# Altium PCB MOTHER FINAL.PcbDoc
Units mm, origin at the board's own origin, x right, y up, seen from the top; angles counter-clockwise.
Board outline 77.72 x 82.8 mm, 2 copper layers (Top Layer, Bottom Layer); 20 components, 25 nets, 91 pads, 8 vias.
Unrouted connection lines stored in the file: 1.
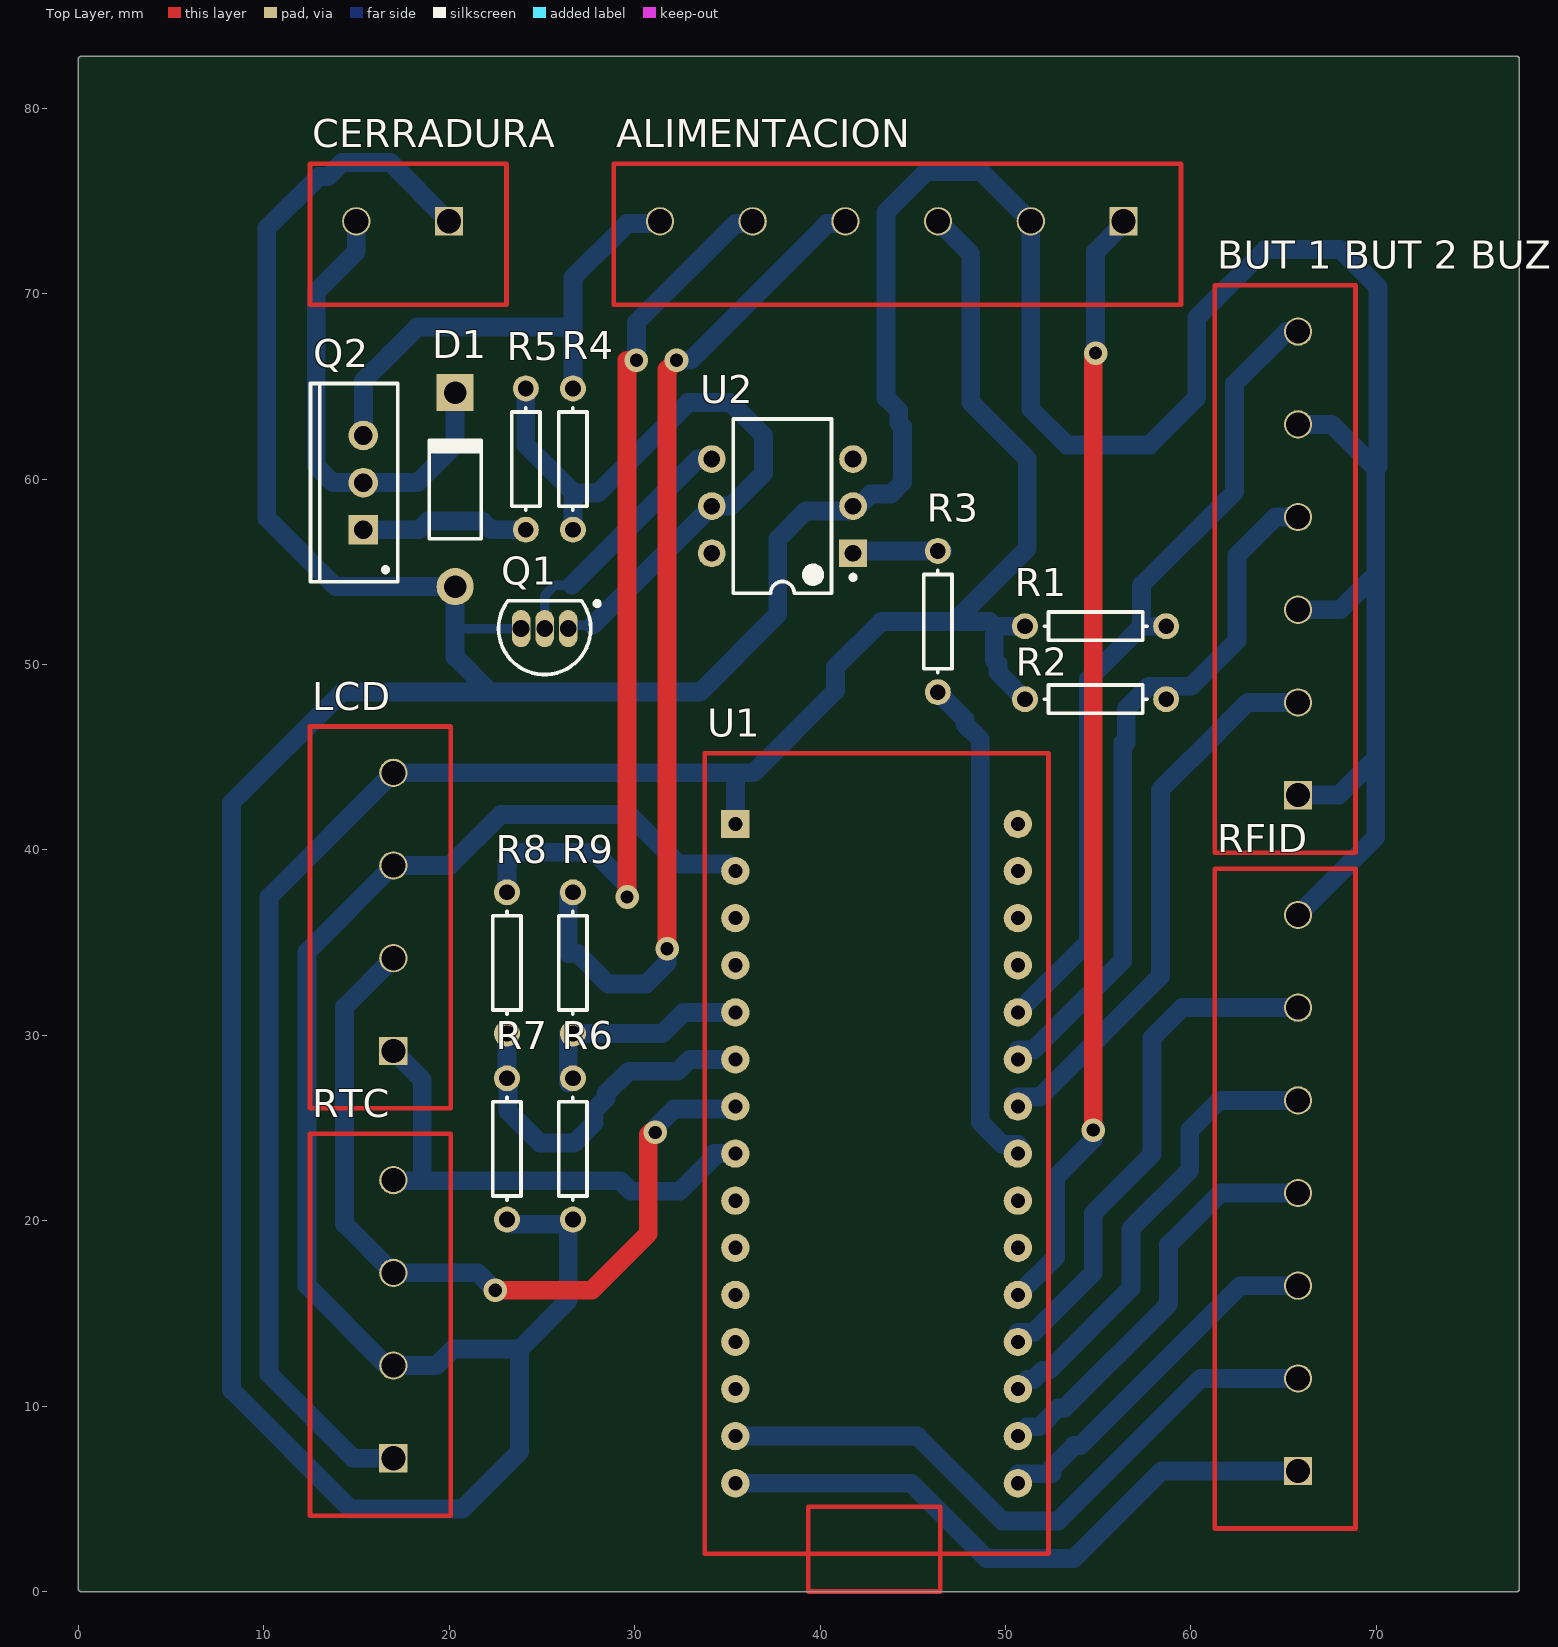
[diagram p0: Top Layer view]
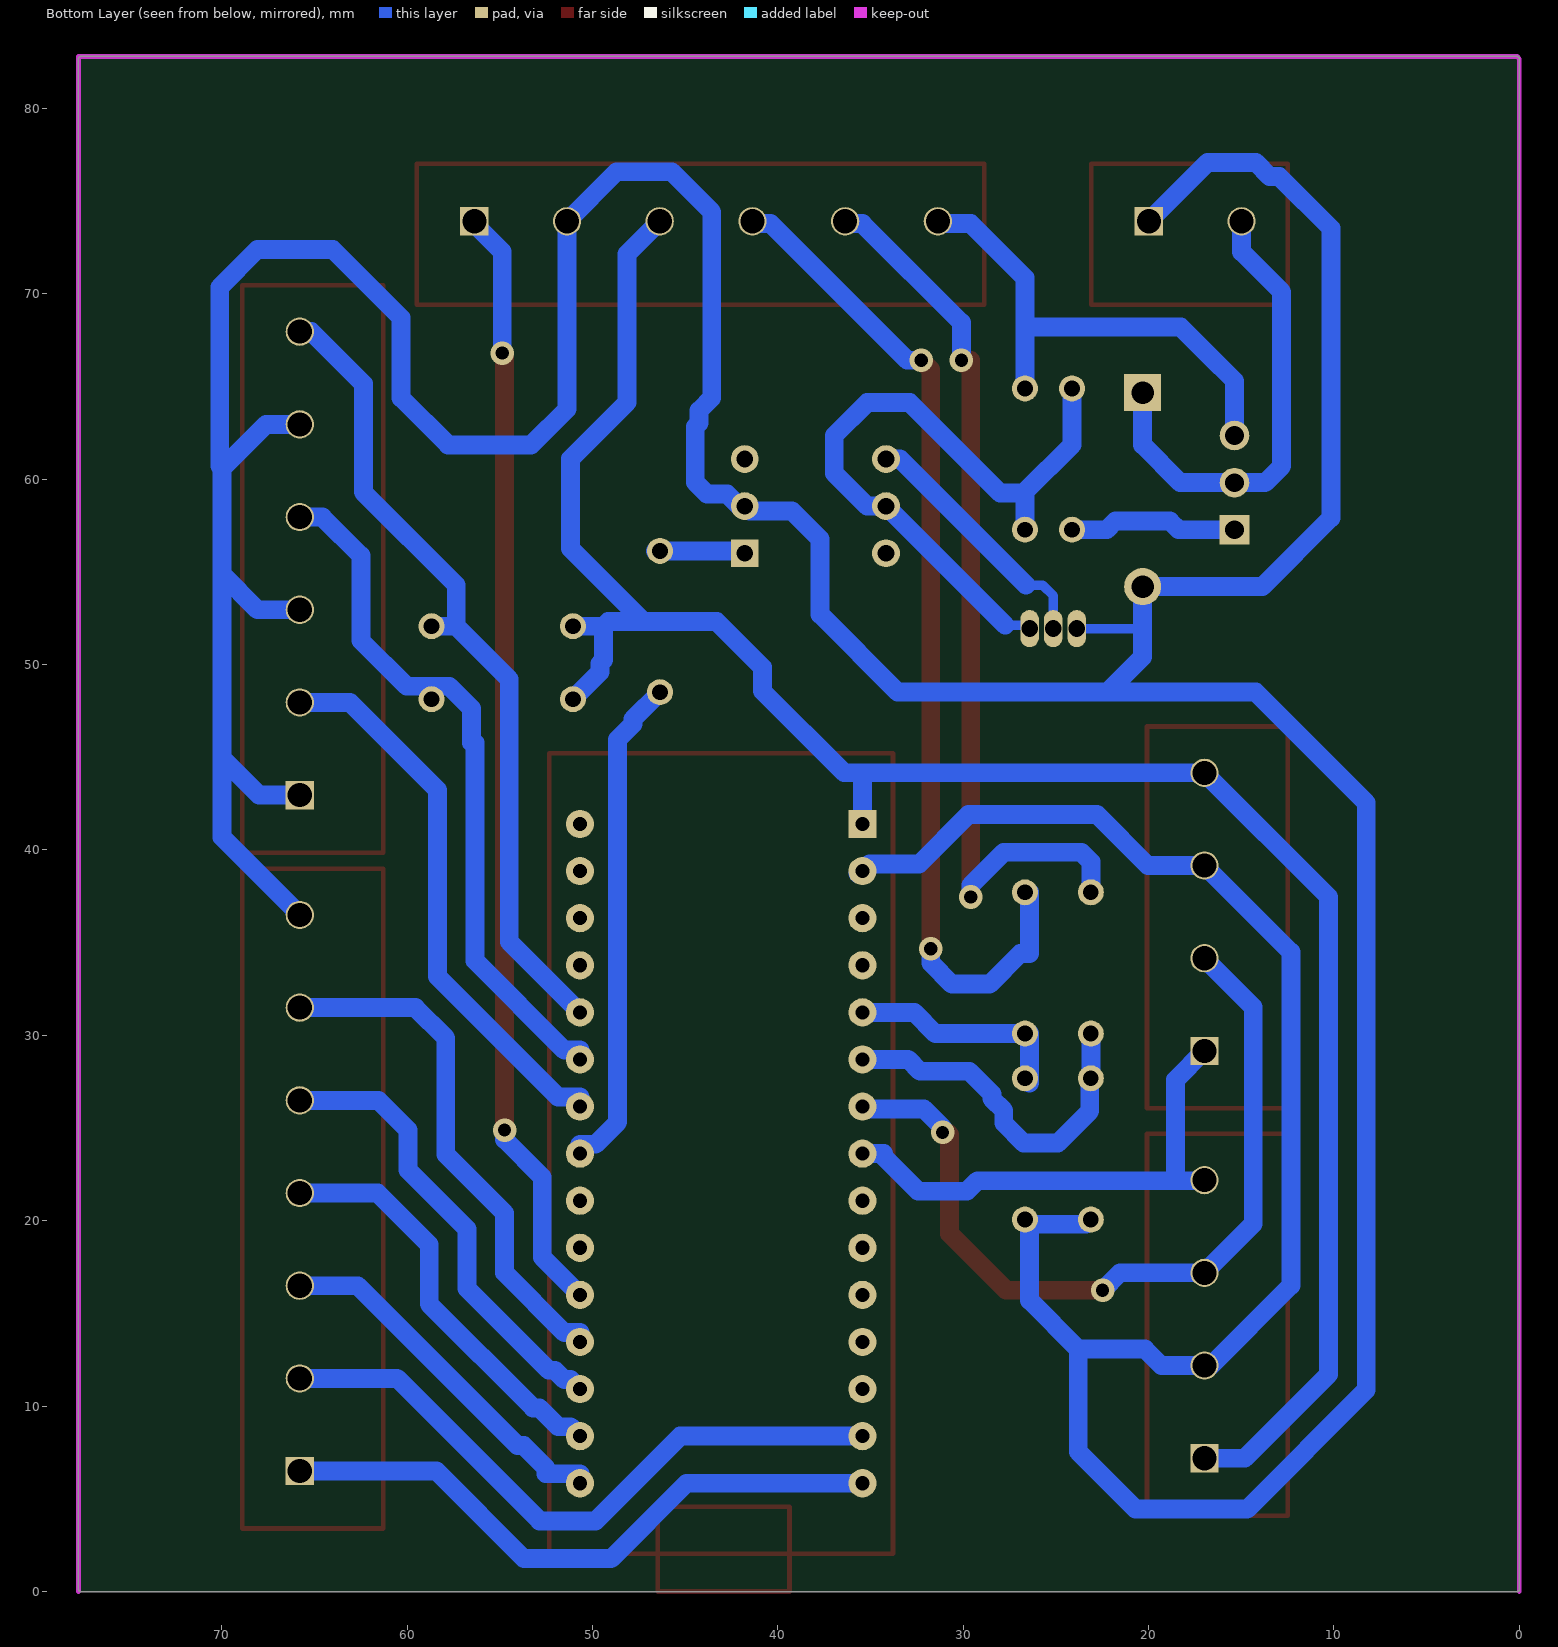
[diagram p1: Bottom Layer view, seen from below]

## Layer stack, top to bottom
Top Solder: solder mask 0.0102, Solder Resist, Dk 3.5
Top Layer: signal copper 0.0356
Dielectric 1: dielectric 0.32, FR-4, Dk 4.8
Bottom Layer: signal copper 0.0356
Bottom Solder: solder mask 0.0102, Solder Resist, Dk 3.5

## Board outline
0,0.127 ccw(c0.127,0.127) 0.127,0 77.597,0 ccw(c77.597,0.127) 77.724,0.127 77.724,82.677 ccw(c77.597,82.677) 77.597,82.804 0.127,82.804 ccw(c0.127,82.677) 0,82.677

## Design rules (kind name [scope] priority, off if disabled: settings)
Clearance [all -  InComponentClass('CLASE VERGA') vs all -  InComponentClass('CLASE VERGA')] p1: gap=2.032 ignorepadtopadclearanceinfootprint=FALSE except(1.016: Arc-Arc Arc-Track Track-Track)
PolygonConnect [All] p1: connectstyle=Relief reliefconductorwidth=0.254 reliefentries=4 polygonreliefangle="90 Angle" airgapwidth=0.254
RoutingVias [All] p1: holewidth=0.711 width=1.27 viastyle="Through Hole" minholewidth=0.711 minwidth=1.27 maxholewidth=0.711 maxwidth=1.27
SolderMaskExpansion [All] p1: expansion=0.102
Width [All] p1: maxlimit=1.016 minlimit=0.508 preferedwidth=1.016
30 further rules are at their usual default settings.

## Classes and differential pairs
component class "Components Class 1": R6 R7
component class "CLASE VERGA": ALIMENTACION "BUT 1 BUT 2 BUZZ" CERRADURA LCD Q1 Q2 R6 R7 R8 R9 RFID RTC U1 U2

## Components (designator, comment, footprint, x,y, rotation, side; value= is the part's Value field where it differs from the comment)
ALIMENTACION "Header 6" "BORNERA 6 PIN" 59.469,69.414 r180 top
"BUT 1 BUT 2 BUZZ" "Header 6" "BORNERA 6 PIN" 61.286,39.859 r90 top
CERRADURA "Header 2" "Bornera 2 pin" 23.086,69.414 r180 top
D1 "Diode 1N4007" DO-41 20.32,59.436 r90 top
LCD "Header 4" "BORNERA 4 PIN" 12.486,26.063 r90 top
Q1 "BC548" TO-92A 25.146,51.943 r90 top
Q2 "TIP32" TO-220AB 15.367,59.817 r90 top
R1 "Res1" AXIAL-0.3 54.864,52.07 r180 top value=1K
R2 "Res1" AXIAL-0.3 54.864,48.133 r180 top value=1K
R3 "Res1" AXIAL-0.3 46.355,52.324 r90 top value=1K
R4 "Res1" AXIAL-0.3 26.67,61.087 r90 top value=1K
R5 "Res1" AXIAL-0.3 24.13,61.087 r270 top value=1K
R6 "Res1" AXIAL-0.3 26.67,23.876 r90 top value=1K
R7 "Res1" AXIAL-0.3 23.114,23.876 r90 top value=1K
R8 "Res1" AXIAL-0.3 23.114,33.909 r90 top value=1K
R9 "Res1" AXIAL-0.3 26.67,33.909 r90 top value=1K
RFID "Header 7" "BORNERA 7 PIN" 61.286,3.396 r90 top
RTC "Header 4" "BORNERA 4 PIN" 12.486,4.092 r90 top
U1 "Arduino Nano" "Arduino nano" 35.433,41.402 r0 top
U2 "Optoisolator1" DIP-6 37.973,58.547 r180 top

## Footprints (in the part's own frame and the unit in brackets; to place one, negate y for a bottom-side part, rotate by r counter-clockwise, add the part's x,y. Pads: shape width x height; smd on the part's side, far side on the other; paste and mask are expansions set on the pad)
"Arduino nano" [mil]
  rect 60x60 hole 30: 1(0,0)
  round 60 hole 30: 2(0,-100) 3(0,-200) 4(0,-300) 5(0,-400) 6(0,-500) 7(0,-600) 8(0,-700) 9(0,-800) 10(0,-900) 11(0,-1000) 12(0,-1100) 13(0,-1200) 14(0,-1300) 15(0,-1400) 16(600,-1400) 17(600,-1300) 18(600,-1200) 19(600,-1100) 20(600,-1000) 21(600,-900) 22(600,-800) 23(600,-700) 24(600,-600) 25(600,-500) 26(600,-400) 27(600,-300) 28(600,-200) 29(600,-100) 30(600,0)
  Top Layer lines w10: -65,-1550 665,-1550 665,150 -65,150 -65,-1550 ; 155,-1630 155,-1550 155,-1450 435,-1450 435,-1550 435,-1630 155,-1630
AXIAL-0.3 [mm] "Axial Device, Thru-Hole; 2 Leads; 0.3 in Pin Spacing"
  round 1.4 hole 0.85: 1(-3.81,0) 2(3.81,0)
  silkscreen extent -2.77,-0.76 2.77,0.76
"Bornera 2 pin" [mm]
  rect 1.524x1.524 hole 1.3: 1(3.1,-4.5)
  round 1.524 hole 1.3: 2(8.1,-4.5)
  Top Layer lines w0.254: 10.6,0 10.6,-7.6 0,-7.6 0,0 10.6,0
"BORNERA 4 PIN" [mm]
  rect 1.524x1.524 hole 1.3: 1(3.1,-4.5)
  round 1.524 hole 1.3: 2(8.1,-4.5) 3(13.1,-4.5) 4(18.1,-4.5)
  Top Layer lines w0.254: 0,0 0,-7.6 20.6,-7.6 20.6,0 0,0
"BORNERA 6 PIN" [mm]
  rect 1.524x1.524 hole 1.3: 1(3.1,-4.5)
  round 1.524 hole 1.3: 2(8.1,-4.5) 3(13.1,-4.5) 4(18.1,-4.5) 5(23.1,-4.5) 6(28.1,-4.5)
  Top Layer lines w0.254: 30.6,0 30.6,-7.6 0,-7.6 0,0 30.6,0
"BORNERA 7 PIN" [mm]
  rect 1.524x1.524 hole 1.3: 1(3.1,-4.5)
  round 1.524 hole 1.3: 2(8.1,-4.5) 3(13.1,-4.5) 4(18.1,-4.5) 5(23.1,-4.5) 6(28.1,-4.5) 7(33.1,-4.5)
  Top Layer lines w0.254: 0,0 35.6,0 35.6,-7.6 0,-7.6 0,0
DIP-6 [mm] "DIP; 6 Leads; Row Spacing 7.62 mm; Pitch 2.54 mm"
  rect 1.5x1.5 hole 0.9: 1(-3.81,2.54)
  round 1.5 hole 0.9: 2(-3.81,0) 3(-3.81,-2.54) 4(3.81,-2.54) 5(3.81,0) 6(3.81,2.54)
  silkscreen extent -3.94,-4.7 2.65,4.7, body extent -3.55,-4.7 3.55,4.7, height 5.46
DO-41 [mm] "Diode, Axial; Body 5.2 x 2.7 mm (LxDia. max), Lead Dia. 0.86 mm (max)"
  round 2 hole 1.2: 1(-5.23,0)
  rect 2x2 hole 1.2: 2(5.23,0)
  silkscreen extent -2.65,-1.4 2.75,1.4
TO-92A [mm] "TO, Flat Index; 3 In-Line, Axial Leads; Body Dia. 4.5mm; Leads 0.51 x 0.48 mm (max)"
  oval 2x1 hole 0.9: 1(0,-1.27) 2(0,0) 3(0,1.27)
  silkscreen extent -2.48,-2.96 1.5,2.48, body extent -2.48,-2.5 1.5,2.5, height 6.86
TO-220AB [mm] "TO, Thru-Hole, Vertical, Heatsink Mounted; 3 In-Line Leads; Pitch 2.54 mm"
  rect 1.6x1.6 hole 1: 1(-2.54,0)
  round 1.6 hole 1: 2(0,0) 3(2.54,0)
  silkscreen extent -5.35,-1.85 5.35,2.85, body extent -5.4,-1.9 5.4,2.9, height 19.3

## Part data
ALIMENTACION "BUT 1 BUT 2 BUZZ": "Header, 6-Pin", LatestRevisionDate=17-Jul-2002, LatestRevisionNote="Re-released for DXP Platform.", Publisher="Altium Limited"
CERRADURA: "Header, 2-Pin", LatestRevisionDate=17-Jul-2002, LatestRevisionNote="Re-released for DXP Platform.", Publisher="Altium Limited"
D1: "1 Amp General Purpose Rectifier", Code_JEDEC=DO-204-AL, ComponentLink1Description="Manufacturer Link", ComponentLink1URL=http://www.fairchildsemi.com/, ComponentLink2Description=Datasheet, ComponentLink2URL=http://www.fairchildsemi.com/ds/1N%2F1N4001.pdf, DatasheetVersion=1998, LatestRevisionDate=17-Jul-2002, LatestRevisionNote="Re-released for DXP Platform.", PackageDescription="Diode, Axial; Body 5.2 x 2.7 mm (LxDia. max), Lead Dia. 0.86 mm (max)", PackageReference=DO-41, PackageVersion=Aug-1999, Published=8-Jun-2000, Publisher="Altium Limited"
LCD RTC: "Header, 4-Pin", LatestRevisionDate=17-Jul-2002, LatestRevisionNote="Re-released for DXP Platform.", Publisher="Altium Limited"
Q1: library part 2N3904, "NPN General Purpose Amplifier", ComponentLink1Description="Manufacturer Link", ComponentLink1URL=http://www.fairchildsemi.com/, ComponentLink2Description=Datasheet, ComponentLink2URL=http://www.fairchildsemi.com/ds/2N%2F2N3904.pdf, DatasheetVersion=1997, LatestRevisionDate=15-Jan-2003, LatestRevisionNote="PCB Footprint 'BCY-W3/D4.7' replaced", PackageDescription="TO, Flat Index; 3 In-Line, Axial Leads; Body Dia. 4.5mm; Leads 0.51 x 0.48 mm (max)", PackageReference=TO-92A, PackageVersion=Sep-1998, Published=8-Jun-2000, Publisher="Altium Limited"
Q2: library part 2N3906, "PNP General Purpose Amplifier", ComponentLink1Description="Manufacturer Link", ComponentLink1URL=http://www.fairchildsemi.com/, ComponentLink2Description=Datasheet, ComponentLink2URL=http://www.fairchildsemi.com/ds/2N%2F2N3906.pdf, DatasheetVersion=1997, LatestRevisionDate=15-Jan-2003, LatestRevisionNote="PCB Footprint 'BCY-W3/D4.7' replaced", PackageDescription="TO, Flat Index; 3 In-Line, Axial Leads; Body Dia. 4.5mm; Leads 0.51 x 0.48 mm (max)", PackageReference=TO-92A, PackageVersion=Sep-1998, Published=8-Jun-2000, Publisher="Altium Limited"
R1 R2 R3 R4 R5 R6 R7 R8 R9: "Resistor", LatestRevisionDate=17-Jul-2002, LatestRevisionNote="Re-released for DXP Platform.", PackageDescription="Axial Device, Thru-Hole; 2 Leads; 0.3 in Pin Spacing", PackageReference=AXIAL-0.3, Published=8-Jun-2000, Publisher="Altium Limited"
RFID: "Header, 7-Pin", LatestRevisionDate=17-Jul-2002, LatestRevisionNote="Re-released for DXP Platform.", Publisher="Altium Limited"
U1: library part Component_1
U2: "4-Pin Phototransistor Optocoupler", DatasheetVersion=Nov-2003, LatestRevisionDate=04-Mar-2005, LatestRevisionNote="Sch pins 3 & 4 Swapped.", PackageReference=DIP-4, Published=24-Mar-1999, Publisher="Altium Limited"

## Via types
v1: diameter 1.27, hole 0.711, Top Layer to Bottom Layer, 8 vias

## Nets (pads, with @x,y where several pads share a name; then routed paths per layer and width w, separated by ;. In a path a pad name is that pad's centre, name@x,y a point inside that pad or via, vN(x,y) a via of type N, cw(c..) or ccw(c..) an arc to the next point about the centre after c; other vN are vias at no path point)
GND: "BUT 1 BUT 2 BUZZ.1" "BUT 1 BUT 2 BUZZ.3" "BUT 1 BUT 2 BUZZ.5" ALIMENTACION.2 CERRADURA.1 D1.1 LCD.3 Q1.3 R6.1 R7.1 RFID.7 RTC.2 U1.2 U1.27 U2.2 | length 335.9
  Bottom Layer w0.508: 20.32,51.943 Q1.3
  Bottom Layer w1.016: CERRADURA.1 16.811,77.089 14.224,77.089 13.462,76.327 12.954,76.327 10.16,73.533 10.16,57.912 13.866,54.206 D1.1 20.32,51.943 20.32,50.419 22.225,48.514 ; R7.1 23.368,19.812 26.416,19.812 26.416,15.703 23.794,13.081 ; U1.2@35.687,38.735 35.56,38.862 U1.2 35.052,39.243 32.385,39.243 29.718,41.91 22.78,41.91 20.033,39.163 LCD.3 12.319,34.496 12.319,16.51 16.637,12.192 RTC.2 19.304,12.192 20.193,13.081 23.794,13.081 ; ALIMENTACION.2@51.369,73.787 51.369,63.787 53.307,61.849 57.785,61.849 60.325,64.389 60.325,68.707 64.008,72.39 68.072,72.39 70.104,70.358 70.104,60.706 69.977,60.579 ; ALIMENTACION.2 48.702,76.581 45.72,76.581 43.561,74.422 43.561,64.389 44.243,63.707 44.243,63.039 44.45,62.832 44.45,59.832 43.815,59.197 42.727,59.197 42.077,58.547 U2.2 41.529,58.293 39.243,58.293 37.719,56.769 37.719,52.705 33.528,48.514 22.225,48.514 ; RFID.7 69.977,40.687 69.977,44.958 ; 65.786,42.959 67.978,42.959 69.977,44.958 ; 65.786,52.959 68.072,52.959 69.977,54.864 ; 65.786,62.959 67.597,62.959 69.977,60.579 ; 22.225,48.514 14.224,48.514 8.255,42.545 8.255,10.875 14.685,4.445 20.701,4.445 23.794,7.538 23.794,13.081 ; 69.977,44.958 69.977,54.864 ; 69.977,54.864 69.977,60.579
NetALIMENTACION_1: ALIMENTACION.6 Q2.3 R4.2 | length 27.3
  Bottom Layer w1.016: Q2.3 15.367,65.305 16.78,66.718 18.268,68.206 26.67,68.206 ; R4.2 26.67,68.206 ; ALIMENTACION.6@31.369,73.787 29.591,73.787 26.67,70.866 26.67,68.206
NetALIMENTACION_2: ALIMENTACION.3 LCD.4 R1.2 R2.2 RTC.1 U1.1 | length 114.7
  Bottom Layer w1.016: RTC.1 14.812,7.192 10.287,11.717 10.287,37.464 LCD.4 35.433,44.163 ; U1.1 35.433,44.163 ; ALIMENTACION.3 48.133,72.15 48.133,64.149 51.181,61.101 51.181,56.261 47.244,52.324 ; R2.2 49.595,49.592 49.595,50.048 49.403,50.24 49.403,52.07 ; R1.2 49.403,52.07 ; 35.433,44.163 36.416,44.163 40.829,48.576 40.829,49.856 43.297,52.324 47.244,52.324 ; 47.244,52.324 49.149,52.324 49.403,52.07
NetALIMENTACION_4: ALIMENTACION.5 R8.2 | length 49.5
  Top Layer w0.508: v1@29.845,66.167 v1(30.099,66.421)
  Top Layer w1.016: v1(29.591,37.465) 29.591,66.421 v1@29.845,66.167
  Bottom Layer w1.016: R8.2@23.114,38.1 23.114,39.37 23.622,39.878 27.813,39.878 29.591,38.1 v1(29.591,37.465) ; v1(30.099,66.421) 30.099,68.453 35.433,73.787 ALIMENTACION.5@36.369,73.787
NetALIMENTACION_5: ALIMENTACION.4 R9.2 | length 54.8
  Top Layer w1.016: v1@31.75,34.544 v1(31.75,34.671) 31.75,65.913 v1(32.258,66.421)
  Bottom Layer w1.016: R9.2@26.416,37.719 26.416,34.417 26.924,34.417 28.575,32.766 30.607,32.766 31.75,33.909 v1(31.75,34.671) ; v1(32.258,66.421) 33.02,66.421 40.386,73.787 ALIMENTACION.4@41.369,73.787
NetALIMENTACION_6: ALIMENTACION.1 U1.20 | length 60.1
  Top Layer w1.016: v1(54.737,24.892) 54.737,66.675 v1(54.864,66.802)
  Bottom Layer w1.016: U1.20 52.705,18.034 52.705,22.352 54.737,24.384 v1(54.737,24.892) ; v1(54.864,66.802) 54.864,72.282 ALIMENTACION.1@56.369,73.787
"NetBUT 1 BUT 2 BUZZ_2": "BUT 1 BUT 2 BUZZ.2" U1.24 | length 30.3
  Bottom Layer w1.016: U1.24 50.673,26.67 51.848,26.67 58.358,33.18 58.358,43.245 60.006,44.893 60.016,44.893 63.082,47.959 65.786,47.959
"NetBUT 1 BUT 2 BUZZ_4": "BUT 1 BUT 2 BUZZ.4" R2.1 U1.25 | length 38
  Bottom Layer w1.016: U1.25 50.673,29.21 51.515,29.21 56.326,34.021 56.326,45.785 ; 56.515,45.785 56.515,47.625 57.72,48.83 60.016,48.83 62.484,51.298 62.484,55.88 64.563,57.959 65.786,57.959
"NetBUT 1 BUT 2 BUZZ_6": "BUT 1 BUT 2 BUZZ.6" R1.1 U1.26 | length 44.7
  Bottom Layer w1.016: U1.26 54.483,35.052 54.483,49.211 57.342,52.07 ; R1.1 57.342,52.07 ; 65.786,67.959 65.165,67.959 62.357,65.151 62.357,59.309 57.342,54.294 57.342,52.07
NetCERRADURA_1: CERRADURA.2 D1.2 Q2.2 | length 25.6
  Bottom Layer w1.016: CERRADURA.2 14.986,72.263 12.827,70.104 12.827,60.706 13.716,59.817 Q2.2 18.288,59.817 20.32,61.849 D1.2
NetLCD_3: LCD.2 RTC.3 U1.7 | length 45.4
  Top Layer w1.016: v1(22.479,16.256) 27.686,16.256 30.734,19.304 30.734,24.638 30.861,24.765 v1(31.115,24.765)
  Bottom Layer w1.016: LCD.2 14.351,31.528 14.351,19.827 RTC.3 21.543,17.192 v1(22.479,16.256) ; v1(31.115,24.765) 31.115,25.019 32.131,26.035 35.306,26.035 U1.7
NetLCD_4: LCD.1 RTC.4 U1.8 | length 27.3
  Bottom Layer w1.016: RTC.4 17.018,22.16 18.542,22.16 ; LCD.1 18.542,27.607 18.542,22.16 ; U1.8 34.29,23.622 34.29,23.45 32.43,21.59 29.8,21.59 29.23,22.16 18.542,22.16
NetQ1_2: Q1.2 U2.4 | length 13.8
  Bottom Layer w0.508: Q1.2 25.146,53.721 25.716,54.291 26.605,54.291
  Bottom Layer w1.016: 26.605,54.291 33.401,61.087 U2.4
NetQ1_3: Q1.1 R4.1 R5.1 U2.5 | length 37.8
  Bottom Layer w0.508: R5.1 R5.1@24.384,64.643 ; Q1.1 26.592,52.119 27.735,52.119
  Bottom Layer w1.016: R5.1 24.13,61.859 26.67,59.319 ; R4.1@26.67,57.593 26.67,59.319 ; 27.735,52.119 U2.5 35.179,58.547 36.957,60.325 36.957,62.357 35.179,64.135 32.886,64.135 28,59.249 26.74,59.249 26.67,59.319
NetQ2_2: Q2.1 R5.2 | length 9.2
  Bottom Layer w1.016: Q2.1 18.385,57.277 18.854,57.746 21.786,57.746 22.255,57.277 R5.2
NetR3_1: R3.1 U1.23 | length 27.2
  Bottom Layer w1.016: R3.1 47.814,47.055 47.814,46.791 48.641,45.964 48.641,25.32 49.831,24.13 50.673,24.13 U1.23
NetR3_2: R3.2 U2.1 | length 4.9
  Bottom Layer w1.016: U2.1 41.91,56.134 R3.2 R3.2@46.609,56.134
NetR6_2: R6.2 R9.1 U1.5 | length 11.9
  Bottom Layer w1.016: R6.2@26.416,27.432 R9.1@26.416,30.099 ; R9.1 31.496,30.099 32.639,31.242 U1.5
NetR7_2: R7.2 R8.1 U1.6 | length 19.7
  Bottom Layer w1.016: R8.1 R7.2 23.176,27.748 23.176,25.916 24.9,24.192 26.732,24.192 27.813,25.273 27.813,25.955 28.448,26.59 28.448,26.842 29.673,28.067 32.338,28.067 32.973,28.702 U1.6
NetRFID_1: RFID.2 U1.14 | length 35.4
  Bottom Layer w1.016: U1.14 45.259,8.382 49.831,3.81 52.849,3.81 60.535,11.496 RFID.2
NetRFID_2: RFID.1 U1.15 | length 34
  Bottom Layer w1.016: U1.15 44.926,5.842 48.99,1.778 53.691,1.778 58.409,6.496 RFID.1
NetRFID_3: RFID.3 U1.16 | length 20
  Bottom Layer w1.016: U1.16 50.673,6.35 52.516,6.35 52.516,6.684 53.706,7.874 54.04,7.874 62.662,16.496 RFID.3
NetRFID_4: RFID.4 U1.17 | length 22.4
  Bottom Layer w1.016: U1.17 51.181,8.89 51.848,8.89 52.864,9.906 53.198,9.906 58.801,15.509 58.801,18.719 61.579,21.496 RFID.4
NetRFID_5: RFID.5 U1.18 | length 24.7
  Bottom Layer w1.016: U1.18 51.181,11.43 51.515,11.43 52.023,11.938 52.356,11.938 56.769,16.351 56.769,19.56 59.944,22.735 59.944,24.892 61.548,26.496 RFID.5
NetRFID_6: RFID.6 U1.19 | length 28.4
  Bottom Layer w1.016: U1.19 50.673,13.97 51.515,13.97 54.737,17.192 54.737,20.402 57.912,23.577 57.912,29.86 59.548,31.496 RFID.6
pads on no net: U1.3 U1.4 U1.9 U1.10 U1.11 U1.12 U1.13 U1.21 U1.22 U1.28 U1.29 U1.30 U2.3 U2.6

## Keep-outs
Bottom Layer:
  lines w0.254: 0,0 0,82.677 0.127,82.804 77.724,82.804 77.724,0